# EAGLE board Prg_CPLD (EAGLE 5.11)
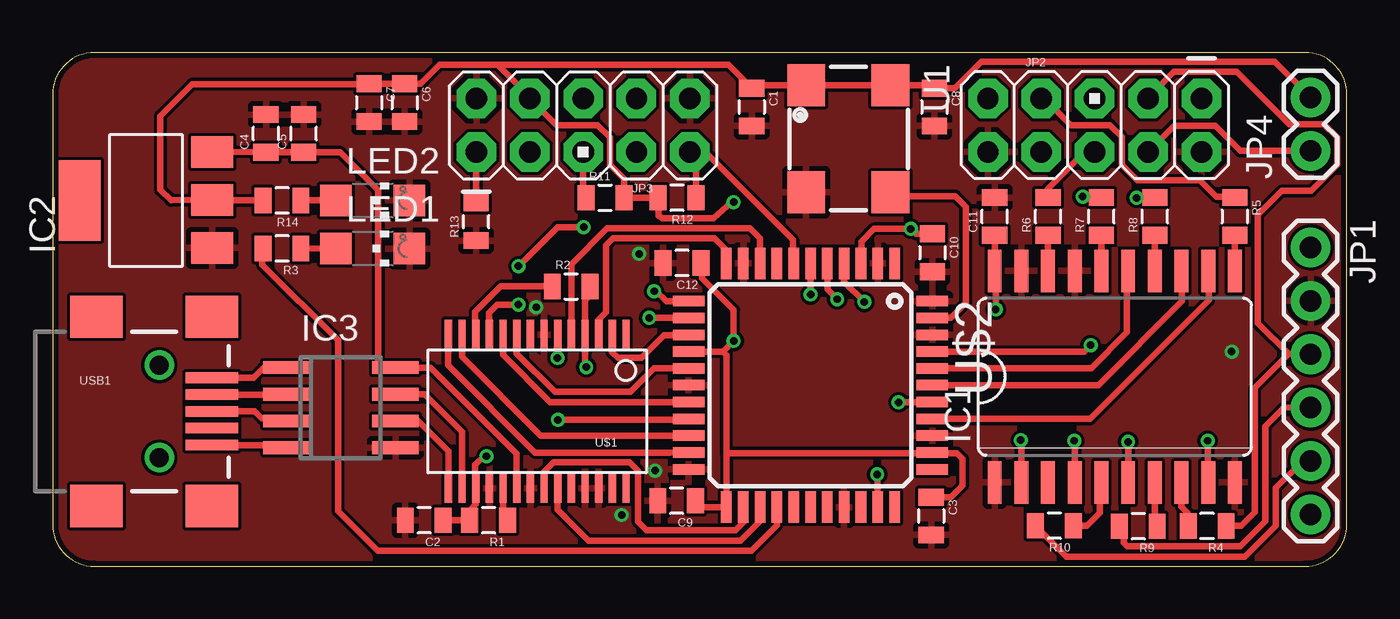
[diagram p0: board, top side]
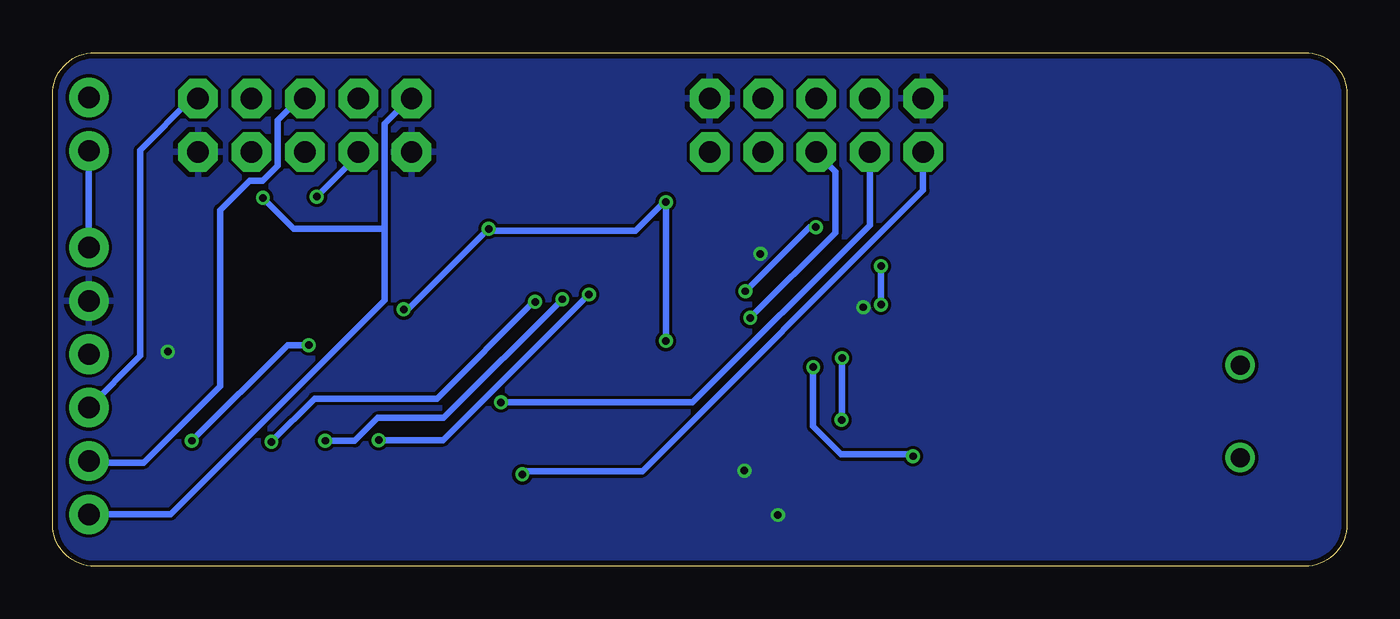
[diagram p1: board, bottom side, seen from below]

Size 61.59 x 24.43 mm. Coordinates in mm from the lower left corner, seen from the top.
Outline: 59.59,0 arc90 61.59,2 61.59,22.44 arc90 59.59,24.43 2,24.43 arc90 0,22.44 0,2 arc90 2,0 59.59,0
Copper layers (1*16): Top 0.035mm / dielectric 1.5mm / Bottom 0.035mm
Design rules "ITead_rule": minimum track width 6mil, minimum drill 12mil, track to track 6mil, track to pad 6mil, pad to pad 6mil, via to via 6mil, smd to smd 0mil, copper to edge 10mil, drill to drill 10mil, minimum pad ring 10mil, minimum via ring 6mil, stop-mask expansion 2mil, vias tented up to drill 100mil, thermal gap 10mil

## Footprints (pad centres in the part's own frame; a part is rotated, then mirrored left to right if it is on the bottom)
0805 = smd 0.8 x 1.2: 1 -0.9,0; 2 0.9,0
SO20W = smd 0.66 x 2.032: 1 -5.715,-5.029; 2 -4.445,-5.029; 3 -3.175,-5.029; 4 -1.905,-5.029; 5 -0.635,-5.029; 6 0.635,-5.029; 7 1.905,-5.029; 8 3.175,-5.029; 9 4.445,-5.029; 10 5.715,-5.029; 11 5.715,5.029; 12 4.445,5.029; 13 3.175,5.029; 14 1.905,5.029; 15 0.635,5.029; 16 -0.635,5.029; 17 -1.905,5.029; 18 -3.175,5.029; 19 -4.445,5.029; 20 -5.715,5.029
SOT223 = smd 1.499 x 2.007: 1 -2.261,-3.15; 2 0.025,-3.15; 3 2.311,-3.15 | smd 3.81 x 2.007: 4 0,3.15
SO08 = smd 0.6 x 2.2: 1 -1.905,-2.6; 2 -0.635,-2.6; 3 0.635,-2.6; 4 1.905,-2.6; 5 1.905,2.6; 6 0.635,2.6; 7 -0.635,2.6; 8 -1.905,2.6
1X06 = drill 1.016 pad 1.88 round: 1 0,0; 2 2.54,0; 3 5.08,0; 4 7.62,0; 5 10.16,0; 6 12.7,0
AVR_ICSP = drill 1.016 pad 1.88 octagon: 1 -1.27,5.08; 2 1.27,5.08; 3 -1.27,2.54; 4 1.27,2.54; 5 -1.27,0; 6 1.27,0; 7 -1.27,-2.54; 8 1.27,-2.54; 9 -1.27,-5.08; 10 1.27,-5.08
1X02 = drill 1.016 pad 1.88 round: 1 0,0; 2 2.54,0
CHIPLED_1206 = smd 1.5 x 1.5: A 0,-1.75; C 0,1.75
CRYSTAL-SMD-7X5 = smd 2 x 1.8: P$1 -2.54,-2; P$2 2.54,-2; P$3 2.54,2; P$4 -2.54,2
SSOP28DB = smd 0.348 x 1.397: 1 -4.225,-3.656; 2 -3.575,-3.656; 3 -2.925,-3.656; 4 -2.275,-3.656; 5 -1.625,-3.656; 6 -0.975,-3.656; 7 -0.325,-3.656; 8 0.325,-3.656; 9 0.975,-3.656; 10 1.625,-3.656; 11 2.275,-3.656; 12 2.925,-3.656; 13 3.575,-3.656; 14 4.225,-3.656; 15 4.225,3.656; 16 3.575,3.656; 17 2.925,3.656; 18 2.275,3.656; 19 1.625,3.656; 20 0.975,3.656; 21 0.325,3.656; 22 -0.325,3.656; 23 -0.975,3.656; 24 -1.625,3.656; 25 -2.275,3.656; 26 -2.925,3.656; 27 -3.575,3.656; 28 -4.225,3.656
TQFP44 = smd 1.5 x 0.5: 1 -5.8,4; 2 -5.8,3.2; 3 -5.8,2.4; 4 -5.8,1.6; 5 -5.8,0.8; 6 -5.8,0; 7 -5.8,-0.8; 8 -5.8,-1.6; 9 -5.8,-2.4; 10 -5.8,-3.2; 11 -5.8,-4; 23 5.8,-4; 24 5.8,-3.2; 25 5.8,-2.4; 26 5.8,-1.6; 27 5.8,-0.8; 28 5.8,0; 29 5.8,0.8; 30 5.8,1.6; 31 5.8,2.4; 32 5.8,3.2; 33 5.8,4 | smd 0.5 x 1.5: 12 -4,-5.8; 13 -3.2,-5.8; 14 -2.4,-5.8; 15 -1.6,-5.8; 16 -0.8,-5.8; 17 0,-5.8; 18 0.8,-5.8; 19 1.6,-5.8; 20 2.4,-5.8; 21 3.2,-5.8; 22 4,-5.8; 34 4,5.8; 35 3.2,5.8; 36 2.4,5.8; 37 1.6,5.8; 38 0.8,5.8; 39 0,5.8; 40 -0.8,5.8; 41 -1.6,5.8; 42 -2.4,5.8; 43 -3.2,5.8; 44 -4,5.8
USB-MINIB-NOSTOP = smd 2.5 x 0.5: D+ 2.5,0; D- 2.5,0.8; GND 2.5,-1.6; ID 2.5,-0.8; VBUS 2.5,1.6 | smd 2.5 x 2: G1 -3,-4.5; G2 -3,4.5; G3 2.5,4.5; G4 2.5,-4.5 | drill 0.9 pad 0.8 round: H1 0,2.2 | drill 0.9 pad 0.787 round: H2 0,-2.2

## Placement (x,y rotation side)
C1  .01uf  [0805]  33.27,21.84 270 top
C2  .1uf  [0805]  17.69,2.19 180 top
C3  .1 uf  [0805]  41.81,2.39 270 top
C4  .1 uf  [0805]  10.16,20.59 90 top
C5  2.2uf  [0805]  11.95,20.59 90 top
C6  .1 uf  [0805]  16.76,22.05 270 top
C7  2.2uf  [0805]  15.06,22.05 270 top
C8  2.2uf  [0805]  41.96,21.84 270 top
C9  .1uf  [0805]  29.7,3.12 180 top
C10  .1uf  [0805]  41.87,14.91 270 top
C11  .1uf  [0805]  44.83,16.64 90 top
C12  .1uf  [0805]  29.95,14.42 180 top
IC1  74LS244DW  [SO20W]  50.55,9.02 0 top
IC2  REG1117M3.3  [SOT223]  4.45,17.4 90 top
IC3  USB6B1  [SO08]  13.72,7.54 270 top
JP1  [1X06]  59.87,15.16 270 top
JP2  M05X2PTH  [AVR_ICSP]  49.59,20.98 270 top
JP3  M05X2PTH  [AVR_ICSP]  25.25,20.98 90 top
JP4  [1X02]  59.87,19.76 90 top
LED1  [CHIPLED_1206]  15.24,15.11 270 top
LED2  [CHIPLED_1206]  15.24,17.4 270 top
R1  1.5k  [0805]  20.75,2.19 180 top
R2  10k  [0805]  24.68,13.31 0 top
R3  1k  [0805]  10.92,15.11 180 top
R4  100  [0805]  54.94,1.92 180 top
R5  100  [0805]  56.26,16.64 270 top
R6  100  [0805]  47.37,16.64 90 top
R7  100  [0805]  49.91,16.64 90 top
R8  100  [0805]  52.45,16.64 90 top
R9  100  [0805]  51.66,1.9 180 top
R10  100  [0805]  47.68,1.93 180 top
R11  10k  [0805]  26.29,17.53 0 top
R12  10k  [0805]  29.72,17.53 180 top
R13  10k  [0805]  20.15,16.39 90 top
R14  1k  [0805]  10.92,17.4 180 top
U1  OSCILLATORSMD  [CRYSTAL-SMD-7X5]  37.86,20.33 270 top
U$1  FT245RL  [SSOP28DB]  23.06,7.37 180 top
U$2  EPM3064A-T44  [TQFP44]  36.07,8.61 270 top
USB1  USB-SMD-NS  [USB-MINIB-NOSTOP]  5.08,7.37 0 top

## Library data of the parts
C1 C2 R1-R3 = NSL_CylonIV
C3-C12 JP1-JP4 U$1 USB1 = SparkFun
IC1 = 74xx-us
IC2 = burr-brown; MPN: REG1117; OC_FARNELL: 1097566; OC_NEWARK: 14P6981
IC3 = st-microelectronics; MPN: USB6B1; OC_FARNELL: 9804358; OC_NEWARK: 26M4750
LED1 LED2 = led
R4-R14 = TVbNull-Laser
U1 U$2 = Prg_CPLD

## Nets
3V3: C1.1 C3.1 C6.1 C7.1 C8.1 C9.1 C10.1 C11.1 C12.1 IC1.20 IC2.2 JP3.4 JP4.2 R11.2 R12.2 R14.2 U1.P$1 U1.P$4 U$2.3 U$2.15 U$2.23 U$2.35
3V3_FT: C2.1 R1.2 R2.2 U$1.4 U$1.17
5V_PC: C4.1 C5.1 IC2.3 IC3.8 U$1.20
CLOCK: U1.P$3 U$2.43
CTCK: JP3.1 R13.2 U$2.32
CTDI: JP3.9 R12.1 U$2.7
CTDO: JP3.3 U$2.38
CTMS: JP3.5 R11.1 U$2.13
D0: U$1.1
D1: U$1.5 U$2.9
D2: U$1.3 U$2.11
D3: U$1.11 U$2.12
D4: U$1.2 U$2.14
D5: U$1.9 U$2.16
D6: U$1.10 U$2.18
D7: U$1.6 U$2.19
D+: IC3.3 USB1.D+
D-: IC3.2 USB1.D-
DM: IC3.7 U$1.16
DO: U$2.8
DP: IC3.6 U$1.15
GND: C1.2 C2.2 C3.2 C4.2 C5.2 C6.2 C7.2 C8.2 C9.2 C10.2 C11.2 C12.2 IC1.1 IC1.10 IC1.17 IC1.19 IC2.1 IC3.5 JP1.2 JP2.2 JP2.10 JP3.2 JP3.10 LED1.C LED2.C R13.1 U1.P$2 U$1.7 U$1.18 U$1.21 U$1.25 U$1.26 U$2.2 U$2.10 U$2.17 U$2.22 U$2.30 U$2.36 U$2.42 U$2.44
N$2: LED2.A R14.1
N$3: LED1.A R3.1
N$4: R1.1 U$1.19
N$6: IC1.8 R4.2
N$8: R2.1 U$1.12
N$9: IC1.18 R6.1
N$10: IC1.16 R7.1
N$11: IC1.14 R8.1
N$13: R3.2 U$2.26
N$15: IC1.7 R9.1
N$16: IC1.5 R10.1
N$18: IC1.11 R5.2
ONCE: JP2.6 R6.2
ONCS: JP2.8 R7.2
ONSTA: JP2.7 R5.1
OTCK: JP1.4 JP2.1 R9.2
OTDI: JP1.6 JP2.9 R8.2
OTDO: JP1.3 JP2.3 R4.1
OTMS: JP1.5 JP2.5 R10.2
RD: U$1.13 U$2.20
RXF: U$1.23 U$2.25
SNCE: IC1.2 U$2.6
SNCS: IC1.4 U$2.5
SNSTA: IC1.9 U$2.41
STCK: IC1.13 U$2.39
STDI: IC1.6 U$2.4
STDO: IC1.12 U$2.37
STMS: IC1.15 U$2.40
TXE: U$1.22 U$2.24
USB_GND: IC3.4 USB1.GND
VBUS: IC3.1 USB1.VBUS
VCC_TARGET: JP1.1 JP2.4 JP4.1
WR: U$1.14 U$2.21

## Tracks (layer width: path | path; a pad name or v marks a point on that pad's centre or on a via)
3V3  (via drill 0.36)
  Top 0.305: U$2.3 38.48,14.42 38.48,15.44 39.09,16.05 v40.84,16.05 41.08,15.81 C10.1 | v44.88,12.22 44.88,13.99 IC1.20 C11.1 | 31.9,10.21 v32.41,10.72 32.41,12.19 30.91,13.69 30.91,14.36 C12.1 | 31.9,10.21 U$2.15 | 31.9,10.21 32.07,10.04 32.07,5.33 | 32.07,5.33 U$2.23 30.9,2.81 C9.1 | U$2.35 41.84,5.38 | 41.84,5.38 32.12,5.38 arc90 32.07,5.33 | 41.84,5.38 43.03,5.38 43.31,5.1 43.31,3.83 42.76,3.29 C3.1 | R14.2 7.49,17.4 IC2.2 5.64,17.4 5.13,17.91 5.13,21.41 6.66,22.94 15.04,22.94 C7.1 C6.1 17.51,22.95 18.41,23.85 21.18,23.85 | v32.41,17.32 32.31,17.32 31.45,16.56 29.03,16.56 28.83,16.66 28.83,17.26 R12.2 R11.2 27.19,18.43 26.52,19.1 26.52,20.4 25.93,20.98 23.98,20.98 JP3.4 22.71,22.33 21.18,23.85 | C1.1 33.3,22.72 | U1.P$4 39.7,22.74 | C1.1 32.17,23.85 21.18,23.85 | JP4.2 58.17,24 44.2,24 42.94,22.74 C8.1 41.96,22.87 U1.P$4 | C1.1 33.27,22.87 U1.P$1 U1.P$4
  Bottom 0.305: v32.41,10.72 v32.41,17.32 32.49,17.32 33.86,15.95 40.74,15.95 v40.84,16.05 44.68,12.22 v44.88,12.22
3V3_FT  (via drill 0.36)
  Top 0.305: R2.2 25.58,12.88 25.35,12.65 25.35,11.71 25.32,11.68 25.32,11.04 U$1.4 25.34,9.54 v25.4,9.47 | v20.65,5.23 20.52,5.23 20.12,4.83 20.12,3.73 U$1.17 20.14,2.95 19.85,2.65 R1.2 C2.1
  Bottom 0.305: v20.65,5.23 20.75,5.33 24.08,5.33 25.4,6.65 v25.4,9.47
5V_PC
  Top 0.305: U$1.20 22.09,5.34 17.98,9.45 IC3.8 15.49,9.45 15.49,17.88 13.69,19.69 C5.1 | 7.47,19.69 IC2.3 C4.1 C5.1 | C5.1
CLOCK
  Top 0.305: U$2.43 42.75,11.81 43.46,12.52 43.46,17.09 42.95,17.6 39.86,17.6 U1.P$3 39.71,17.6
CTCK  (via drill 0.36)
  Top 0.305: U$2.32 39.24,2.81 v39.24,4.37 | R13.2 20.15,19.7 JP3.1
  Bottom 0.305: JP3.1 20.17,17.88 33.53,4.52 39.09,4.52 v39.24,4.37
CTDI
  Top 0.305: U$2.7 35.23,14.45 35.23,15.52 31.04,19.71 JP3.9 30.62,19.42 R12.1
CTDO  (via drill 0.36)
  Top 0.305: U$2.38 41.85,7.8 v40.26,7.8
  Bottom 0.305: v40.26,7.8 31.14,7.8 22.71,16.23 JP3.3
CTMS  (via drill 0.36)
  Top 0.305: U$2.13 v28.4,11.81 | R11.1 25.25,17.41 JP3.5
  Bottom 0.305: v28.4,11.81 24.33,15.88 24.33,18.77 25.25,19.69 JP3.5
D1
  Top 0.305: U$2.9 33.67,15.61 33.2,16.08 26.39,16.08 24.69,14.38 U$1.5
D2
  Top 0.305: U$1.3 25.99,11.73 26.34,12.08 26.34,15.27 26.67,15.6 31.5,15.6 32.07,15.02 U$2.11
D3  (via drill 0.36)
  Top 0.305: U$2.12 30.26,12.6 29.21,12.6 28.73,13.08 v28.63,13.08 | v25.27,16.13 24.03,16.13 v22.17,14.27 | v22.17,12.45 21.16,12.45 20.78,12.06 20.78,11.03 U$1.11
  Bottom 0.305: v28.63,13.08 25.58,16.13 v25.27,16.13 | v22.17,14.27 v22.17,12.45
D4
  Top 0.305: U$2.14 29.53,11.01 29.52,11 29.11,11 28.02,9.91 26.9,9.91 26.62,10.18 26.62,11 U$1.2
D5
  Top 0.305: U$2.16 28.61,9.41 27.51,8.31 23.9,8.31 22.09,10.12 U$1.9 22.05,10.98
D6
  Top 0.305: U$2.18 23.68,7.81 21.44,10.06 U$1.10
D7  (via drill 0.36)
  Top 0.305: U$2.19 30.22,6.96 v24.05,6.96 | v24.03,9.91 v24.04,9.92 U$1.6
  Bottom 0.305: v24.05,6.96 24.03,6.98 v24.03,9.91
D+
  Top 0.305: IC3.3 10.99,7.04 9.96,7.04 9.63,7.37 USB1.D+
D-
  Top 0.305: IC3.2 11.1,8.17 USB1.D-
DM
  Top 0.305: IC3.7 17.7,8.18 19.49,6.39 U$1.16
DP
  Top 0.305: IC3.6 17.4,6.91 18.84,5.47 U$1.15
GND  (via drill 0.36)
  other vias: 23.01,12.32 28.68,4.55 27.08,2.44 27.91,14.86 56.11,10.21
  pour Top: -2.26,29.64 66.88,29.39 66.5,-3.43 -2.64,-3.18
  pour Bottom: 66.19,28.8 -2.16,28.8 -2.16,-2.54 66.19,-2.54
N$2
  Top 0.305: LED2.A R14.1
N$3
  Top 0.305: R3.1 LED1.A
N$4
  Top 0.305: U$1.19 21.44,2.67 21.65,2.46 R1.1
N$6
  Top 0.305: R4.2 54,1.96 54,2.54 53.72,2.82 IC1.8
N$8
  Top 0.305: U$1.12 20.12,11.04 20.12,12.12 21.31,13.31 R2.1
N$9
  Top 0.305: IC1.18 R6.1
N$10
  Top 0.305: IC1.16 R7.1
N$11
  Top 0.305: IC1.14 R8.1
N$13
  Top 0.305: R3.2 9.98,15.07 9.98,14.35 13.59,10.74 13.59,2.62 15.47,0.74 33.25,0.74 34.47,1.96 U$2.26
N$15
  Top 0.305: R9.1 52.45,2.02 IC1.7
N$16
  Top 0.305: IC1.5 49.84,3.91 49.84,2.54 49.22,1.93 R10.1
N$18
  Top 0.305: IC1.11 R5.2
ONCE
  Top 0.305: R6.2 47.37,17.96 49.12,19.71 JP2.6
ONCS  (via drill 0.36)
  Top 0.305: R7.2 49.87,17.58 v49.02,17.58
  Bottom 0.305: v49.02,17.58 47.05,19.55 JP2.8
ONSTA
  Top 0.305: R5.1 56.22,17.58 55.37,17.58 54.59,18.36 51.61,18.36 50.88,19.1 50.88,20.42 50.32,20.98 48.46,20.98 47.19,22.25 JP2.7
OTCK
  Top 0.305: R9.2 50.98,1.69 50.98,1.12 51.16,0.94 56.52,0.94 57.71,2.13 57.71,6.65 58.61,7.56 JP1.4
  Bottom 0.305: JP2.1 54.97,22.25 57.43,19.79 57.43,10.01 JP1.4
OTDI  (via drill 0.36)
  Top 0.305: R8.2 v51.59,17.53
  Bottom 0.305: 45.8,16.05 45.8,12.65 55.97,2.48 JP1.6 | 45.8,16.05 45.8,21.06 44.6,22.25 JP2.9 | v51.59,17.53 50.11,16.05 45.8,16.05
OTDO
  Top 0.305: R4.1 55.85,1.93 56.57,1.93 57.2,2.56 57.2,8.48 58.82,10.1 | 58.82,10.1 JP1.3 | JP2.3 52.3,22.25 52.3,22.45 53.37,23.52 56.36,23.52 58.85,21.03 60.5,21.03 61.14,20.4 61.14,19.1 59.89,17.86 58.5,17.86 57.35,16.71 57.35,11.56 58.82,10.1
OTMS
  Top 0.305: R10.2 48.25,0.46 56.74,0.46 58.22,1.93 58.22,3.73 59.49,5 JP1.5
  Bottom 0.305: JP2.5 49.84,22.25 50.88,21.21 50.88,19.05 51.59,18.34 52.22,18.34 53.62,16.94 53.62,8.56 57.25,4.93 59.78,4.93 JP1.5
RD
  Top 0.305: U$2.20 23.23,6.21 19.48,9.96 U$1.13
RXF
  Top 0.305: U$1.23 24.03,3.7 24.03,2.69 25.5,1.22 32.74,1.22 33.67,2.15 U$2.25
SNCE  (via drill 0.36)
  Top 0.305: IC1.2 46.1,5.97 v46.08,5.99 | v36.07,12.93 U$2.6
  Bottom 0.305: v46.08,5.99 43,5.99 v36.07,12.93
SNCS  (via drill 0.36)
  Top 0.305: IC1.4 48.64,5.94 v48.62,5.97 | v37.34,12.7 36.87,13.17 U$2.5
  Bottom 0.305: v48.62,5.97 47.22,5.97 46.13,7.06 42.98,7.06 v37.34,12.7
SNSTA  (via drill 0.36)
  Top 0.305: v54.97,5.97 54.97,4.01 IC1.9 | U$2.41 49.1,10.21 v49.4,10.52
  Bottom 0.305: v49.4,10.52 50.42,10.52 v54.97,5.97
STCK
  Top 0.305: U$2.39 49.76,8.61 53.75,12.6 53.75,14.02 IC1.13
STDI  (via drill 0.36)
  Top 0.305: IC1.6 | v51.18,5.92 IC1.6 | v38.63,12.57 37.67,13.54 U$2.4
  Bottom 0.305: v51.18,5.92 49.12,7.98 43.31,7.98 38.71,12.57 v38.63,12.57
STDO
  Top 0.305: U$2.37 43.31,7.01 49.38,7.01 55.02,12.65 55.02,14.02 IC1.12
STMS
  Top 0.305: U$2.40 41.88,9.42 49.43,9.42 51.13,11.12 51.13,14 IC1.15 51.16,14.02
TXE
  Top 0.305: 32.84,2.78 U$2.24 32.87,2.08 32.49,1.7 28.27,1.7 27.86,2.11 27.86,4.55 27.46,4.95 23.85,4.95 23.39,4.49 U$1.22
USB_GND
  Top 0.305: IC3.4 10.99,5.77 USB1.GND
VBUS
  Top 0.305: IC3.1 11.09,9.42 10.03,9.42 9.58,8.97 USB1.VBUS
VCC_TARGET
  Top 0.305: JP4.1 56.52,19.76 55.32,20.95 53.38,20.95 JP2.4
  Bottom 0.305: JP1.1 59.88,19.63 JP4.1
WR
  Top 0.305: U$2.21 29.35,5.41 22.96,5.41 18.82,9.55 18.82,11 U$1.14